# Altium PCB EPM240_Board.PcbDoc
Units mm, origin at the board's own origin, x right, y up, seen from the top; angles counter-clockwise.
Board outline 53.8 x 69.2 mm, 2 copper layers (Top Layer, Bottom Layer), stack 1.571 mm thick; 69 components, 96 nets, 360 pads, 116 vias.
Unrouted connection lines stored in the file: 13.
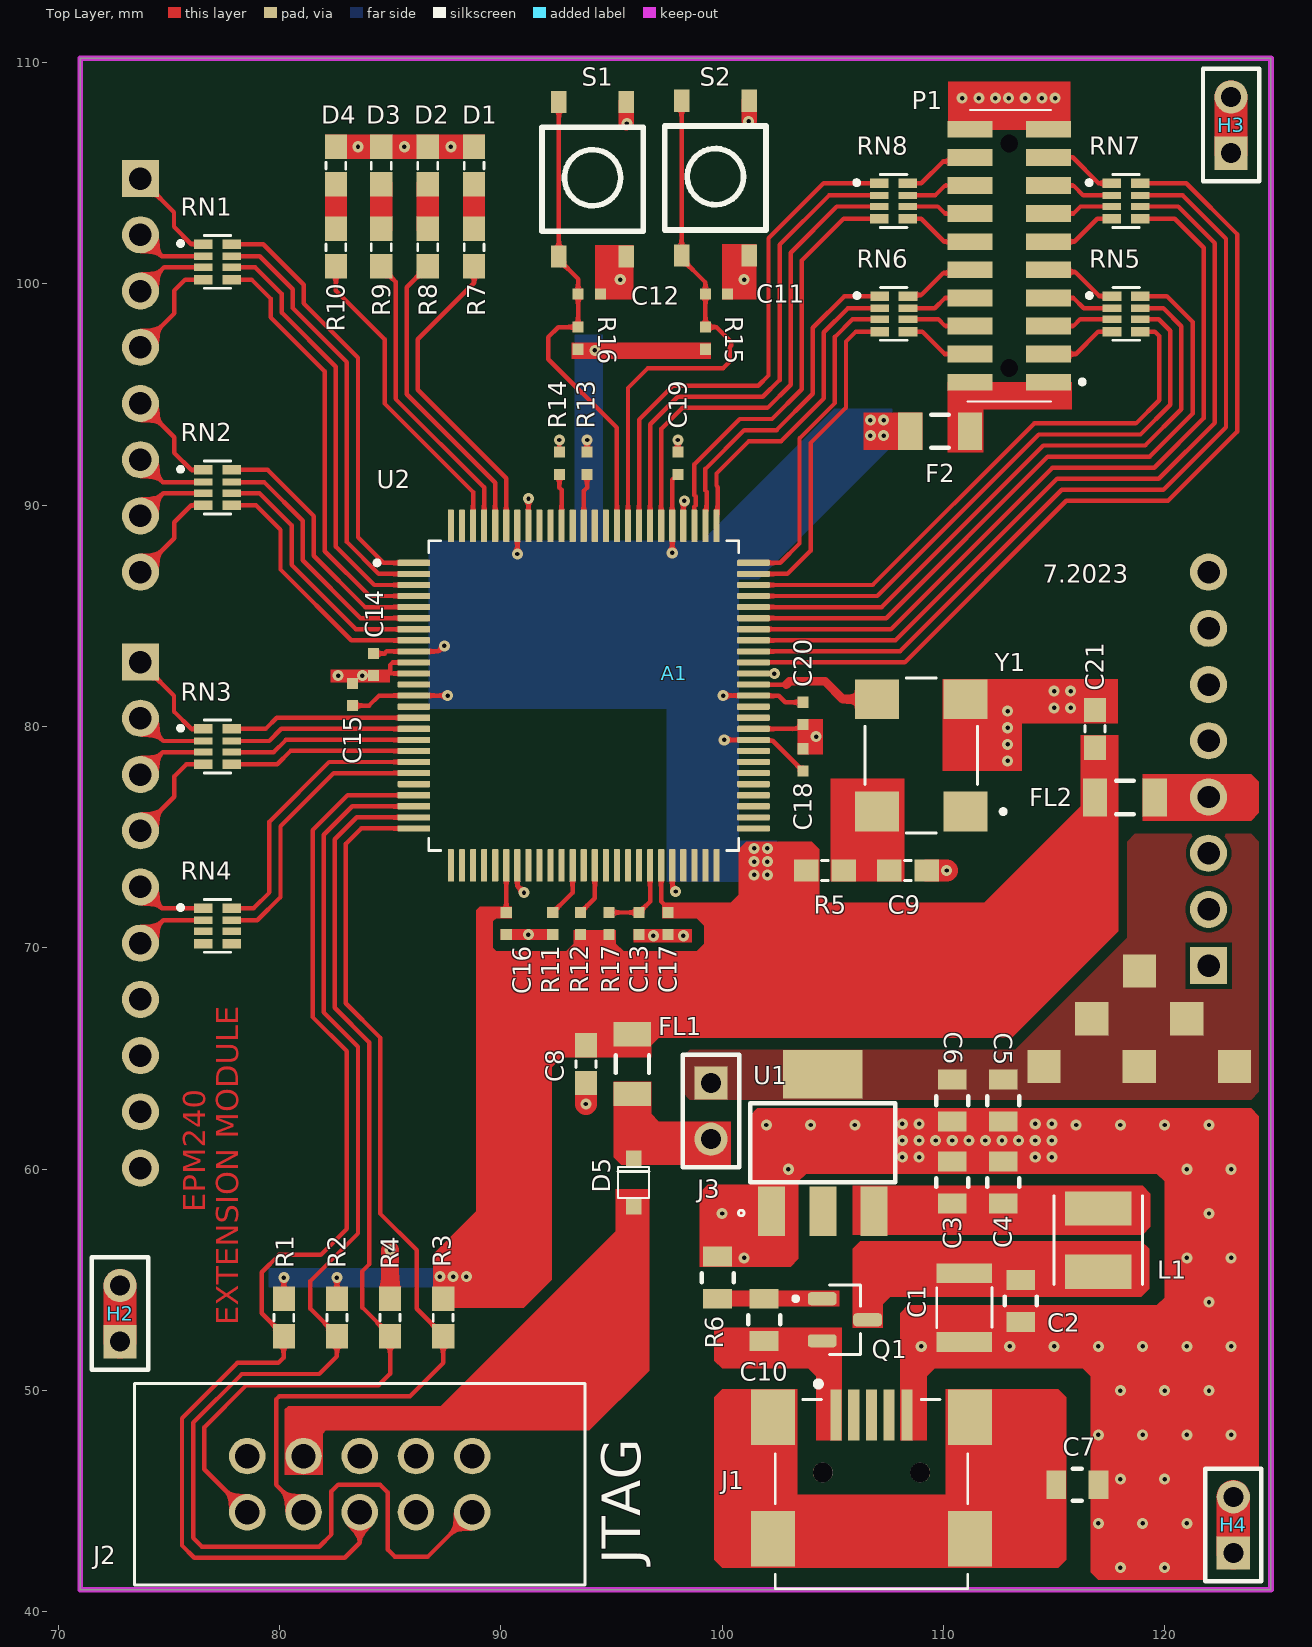
[diagram p0: Top Layer view]
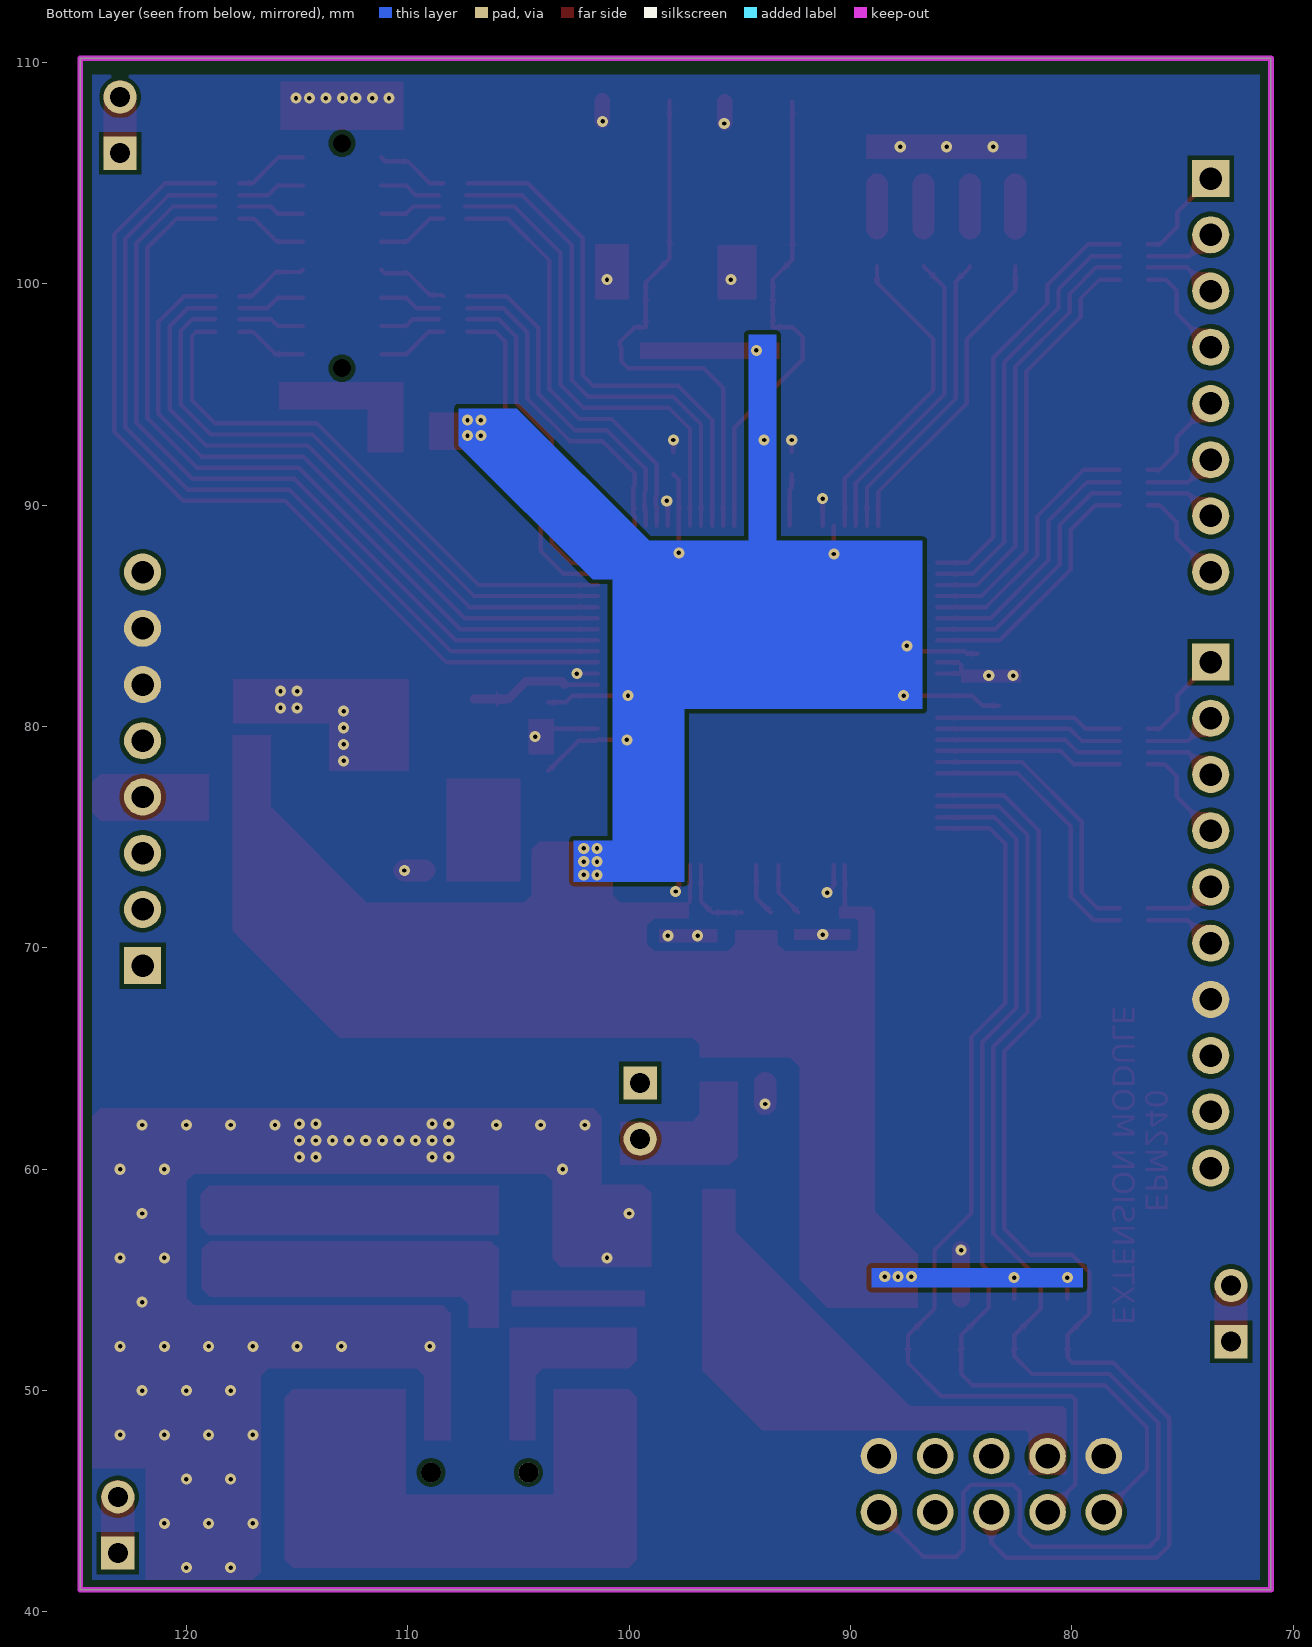
[diagram p1: Bottom Layer view, seen from below]

## Layer stack, top to bottom
Top Solder: solder mask 0.0102, Solder Resist, Dk 3.5
Top Layer: signal copper 0.0356
Dielectric 1: dielectric 1.5, FR-4, Dk 4.8
Bottom Layer: signal copper 0.0356
Bottom Solder: solder mask 0.0102, Solder Resist, Dk 3.5

## Board outline
71,41 71,110.2 124.8,110.2 124.8,41

## Design rules (kind name [scope] priority, off if disabled: settings)
Clearance [All] p1: gap=0.154 ignorepadtopadclearanceinfootprint=TRUE except(0.2: Arc-Poly Arc-Region Track-Poly Track-Region SMDPad-Poly SMDPad-Region THPad-Poly THPad-Region Via-Poly Via-Region Fill-Poly Fill-Region Poly-Poly Poly-Region Region-Region; 0.3: Arc-Track Track-Track)
ComponentClearance [All] p1: gap=0 collisioncheckmode=3 verticalgap=2540 showdistances=FALSE
DiffPairsRouting [All] p1: maxlimit=0.6 minlimit=0.4 mostfreqgap=0.6 toplayer_minwidth=0.2 toplayer_maxwidth=0.2 toplayer_prefwidth=0.2 bottomlayer_minwidth=0.2 bottomlayer_maxwidth=0.2 bottomlayer_prefwidth=0.2 maxuncoupledlength=12.7
MinimumSolderMaskSliver [All] p1: minsoldermaskwidth=0
ParallelSegment [All] p1: limit=254 gap=0.6
PlaneConnect [All] p1: planeconnectstyle=Direct reliefexpansion=0.508 reliefentries=4 reliefconductorwidth=0.254 reliefairgap=0.254
PolygonConnect [All] p1: connectstyle=Direct reliefconductorwidth=0.254 reliefentries=4 polygonreliefangle="90 Angle" airgapwidth=0.254
RoutingVias [All] p1: holewidth=0.2 width=0.5 viastyle="Through Hole" minholewidth=0.2 minwidth=0.5 maxholewidth=0.2 maxwidth=0.5
SilkToSilkClearance [All] p1: silktosilkclearance=0.154
SilkToSolderMaskClearance [IsPad] p1: minsilkscreentomaskgap=0 clearancetoexposedcopper=TRUE
SolderMaskExpansion [All] p1: expansion=0.102 istentingtop=FALSE
Width [All] p1: maxlimit=5 minlimit=0.2 preferedwidth=0.2
24 further rules are at their usual default settings.

## Classes and differential pairs
net class D[29..0]: D0 D1 D2 D3 D4 D5 D6 D7 D8 D9 D10 D11 D12 D13 D14 D15 D16 D17 D18 D19 D20 D21 D22 D23 D24 D25 D26 D27 D28 D29
component class U_PLD: A1 C8 C9 C11 C12 C13 C14 C15 C16 C17 C18 C19 C20 C21 D1 D2 D3 D4 D5 F2 FL1 FL2 H2 H3 H4 J2 P1 R1 R2 R3 R4 R5 R7 R8 R9 R10 R11 R12 R13 R14 R15 R16 R17 RN1 RN2 RN3 RN4 RN5 RN6 RN7 RN8 S1 S2 U2 Y1
component class PWR: C1 C2 C3 C4 C5 C6 C7 C10 J1 J3 L1 Q1 R6 U1

## Components (designator, comment, footprint, x,y, rotation, side; value= is the part's Value field where it differs from the comment)
A1 "A000066" ARDUINO_A000066 124.52,41.26 r90 top locked
C1 "Cap" WCAP-CSGP_885012209019 110.95,53.75 r90 top value=47uF
C2 "Cap" WCAP-CSST_885382207009 113.5,54.05 r90 top value=100nF
C3 "Cap" WCAP-CSST_885382207009 110.4,59.4 r270 top value=100nF
C4 "Cap" WCAP-CSST_885382207009 112.7,59.4 r270 top value=10uF
C5 "Cap" WCAP-CSST_885382207009 112.7,63.1 r90 top value=10uF
C6 "Cap" WCAP-CSST_885382207009 110.4,63.1 r90 top value=100nF
C7 "Cap" WCAP-CSST_885382207009 116.05,45.75 r0 top value=1nF
C8 "Cap" CAPC1608X90 93.85,64.75 r90 top value=100nF
C9 "Cap" CAPC1608X90 108.4,73.5 r180 top value=100nF
C10 "Cap" WCAP-CSST_885382207009 101.9,53.2 r270 top value=10nF
C11 "Cap" WCAP-CSGP_885012105016 99.75,99.55 r180 top value=100nF
C12 "Cap" WCAP-CSGP_885012105016 94,99.55 r180 top value=100nF
C13 "Cap" WCAP-CSGP_885012105016 96.25,71.1 r90 top value=100nF
C14 "Cap" WCAP-CSGP_885012105016 84.25,82.8 r90 top value=100nF
C15 "Cap" WCAP-CSGP_885012105016 83.3,81.45 r270 top value=100nF
C16 "Cap" WCAP-CSGP_885012105016 90.25,71.1 r90 top value=100nF
C17 "Cap" WCAP-CSGP_885012105016 97.55,71.1 r90 top value=100nF
C18 "Cap" WCAP-CSGP_885012105016 103.65,78.5 r270 top value=100nF
C19 "Cap" WCAP-CSGP_885012105016 98,91.9 r270 top value=100nF
C20 "Cap" WCAP-CSGP_885012105016 103.65,80.6 r90 top value=100nF
C21 "Cap" CAPC1608X90 116.85,79.9 r270 top value=100nF
D1 "LED0" CAPC1608X90 88.8,105.35 r90 top
D2 "LED0" CAPC1608X90 86.7,105.35 r90 top
D3 "LED0" CAPC1608X90 84.6,105.35 r90 top
D4 "LED0" CAPC1608X90 82.55,105.35 r90 top
D5 "BAS16J" SOD323F 96,59.4 r270 top
F2 "Fuse Thermal" C1206 109.85,93.35 r180 top
FL1 "BLM21BD152SZ1D" C1206 95.95,64.75 r90 top
FL2 "BLM21BD152SZ1D" C1206 118.2,76.8 r0 top
H2 "Header 2" HDR1X2 72.8,52.21 r90 top
H3 "Header 2" HDR1X2 123,105.91 r90 top
H4 "Header 2" HDR1X2 123.1,42.66 r90 top
J1 "3-1734035-2" TE_3-1734035-2 106.75,46.3 r0 top
J2 "JTAG" 61201021621 83.63,45.77 r0 top
J3 "USB POWER" HDR1X2 99.5,63.9 r270 top
L1 "LQH44NN4R7M03L" IND_LQH44NN4R7M03L 117,56.8 r90 top
P1 "Header 10X2" 2002132110020C4LF 112.975,101.275 r270 top
Q1 "IRLML6402TRPBF" SOT95P237X112-3N 105.55,53.2 r0 top
R1 "Res1" CAPC1608X90 80.2,53.3 r270 top value=10K
R2 "Res1" CAPC1608X90 82.6,53.3 r270 top value=10K
R3 "Res1" CAPC1608X90 87.4,53.3 r270 top value=10K
R4 "Res1" CAPC1608X90 85,53.3 r270 top value=10K
R5 "Res1" CAPC1608X90 104.65,73.5 r180 top value=10
R6 "Res1" WCAP-CSST_885382207009 99.8,55.1 r270 top value=100
R7 "Res1" CAPC1608X90 88.8,101.65 r270 top value=1K
R8 "Res1" CAPC1608X90 86.7,101.65 r270 top value=1K
R9 "Res1" CAPC1608X90 84.6,101.65 r270 top value=1K
R10 "Res1" CAPC1608X90 82.55,101.65 r270 top value=1K
R11 "Res1" WCAP-CSGP_885012105016 92.35,71.1 r270 top value=0
R12 "Res1" WCAP-CSGP_885012105016 93.6,71.1 r270 top value=0
R13 "Res1" WCAP-CSGP_885012105016 93.9,91.9 r270 top value=0
R14 "Res1" WCAP-CSGP_885012105016 92.65,91.9 r270 top value=0
R15 "Res1" WCAP-CSGP_885012105016 99.25,97.55 r270 top value=10K
R16 "Res1" WCAP-CSGP_885012105016 93.5,97.55 r270 top value=10K
R17 "Res1" WCAP-CSGP_885012105016 94.9,71.1 r270 top value=10K
RN1 "741X083681JP" RESCAXS50P200X100X45_8N 77.2,101 r0 top
RN2 "741X083681JP" RESCAXS50P200X100X45_8N 77.2,90.8 r0 top
RN3 "741X083681JP" RESCAXS50P200X100X45_8N 77.2,79.1 r0 top
RN4 "741X083681JP" RESCAXS50P200X100X45_8N 77.2,71 r0 top
RN5 "741X083681JP" RESCAXS50P200X100X45_8N 118.26,98.65 r0 top
RN6 "741X083681JP" RESCAXS50P200X100X45_8N 107.76,98.65 r0 top
RN7 "741X083681JP" RESCAXS50P200X100X45_8N 118.25,103.75 r0 top
RN8 "741X083681JP" RESCAXS50P200X100X45_8N 107.75,103.75 r0 top
S1 "SW-PB" SW_4.5X4.5 94.15,104.8 r90 top
S2 "SW-PB" SW_4.5X4.5 99.7,104.85 r90 top
U1 "LD1117S33CTR" SOT223 104.55,61.2 r90 top
U2 "EPM240T100C5N" QFP50P1600X1600X120-100N 93.75,81.4 r0 top
Y1 "ASV-50.000MHZ-EJ-T" XTAL_ASV-50.000MHZ-EJ-T 109,78.7 r180 top

## Footprints (in the part's own frame and the unit in brackets; to place one, negate y for a bottom-side part, rotate by r counter-clockwise, add the part's x,y. Pads: shape width x height; smd on the part's side, far side on the other; paste and mask are expansions set on the pad)
61201021621 [mm]
  round 1.65 hole 1.1: 1(-5.08,-1.27) 2(-5.08,1.27) 3(-2.54,-1.27) 4(-2.54,1.27) 5(0,-1.27) 6(0,1.27) 7(2.54,-1.27) 8(2.54,1.27) 9(5.08,-1.27) 10(5.08,1.27)
  silkscreen extent -10.18,-4.55 10.18,4.55
2002132110020C4LF [mm]
  rect 0.76x2.05 smd: 1(5.715,1.775) 2(5.715,-1.775) 3(4.445,1.775) 4(4.445,-1.775) 5(3.175,1.775) 6(3.175,-1.775) 7(1.905,1.775) 8(1.905,-1.775) 9(0.635,1.775) 10(0.635,-1.775) 11(-0.635,1.775) 12(-0.635,-1.775) 13(-1.905,1.775) 14(-1.905,-1.775) 15(-3.175,1.775) 16(-3.175,-1.775) 17(-4.445,1.775) 18(-4.445,-1.775) 19(-5.715,1.775) 20(-5.715,-1.775)
  round 0.405 hole 0.81 unplated: 21(-5.08,0) 22(5.08,0)
  silkscreen extent -6.58,-1.88 6.58,3.4
ARDUINO_A000066 [mil]
  round 66 hole 40: 3V3(1400,100) 5V(1500,100) A4(SDA)(840,2000) A5(SCL)(740,2000) AREF(940,2000) D1(2400,2000) D2(2300,2000) D3(2200,2000) D4(2100,2000) D5(2000,2000) D6(1900,2000) D7(1800,2000) D9(1540,2000) D10(1440,2000) D11(1340,2000) D12(1240,2000) D13(1140,2000) GND_1(1700,100) GND_2(1600,100) GND_3(1040,2000) IOREF(1200,100) RST(1300,100) VIN(1800,100)
  rect 66x66 / inner round 66 / far side rect 66x66 hole 40: D0(2500,2000) D8(1640,2000) P1(1100,100)
C1206 [mm] "Chip Capacitor, Body 3.2x1.6mm, IPC High Density"
  rect 1.1x1.7 smd: 1(-1.35,0) 2(1.35,0)
  silkscreen extent -0.4,-0.75 0.4,0.75, body extent -1.7,-0.9 1.7,0.9, height 1.3
CAPC1608X90 [mm]
  rect 1.1x1 smd: 1(-0.85,0) 2(0.85,0)
  silkscreen extent -0.15,-0.45 0.15,0.45
HDR1X2 [mm] "Connector; Header; 2 Position"
  rect 1.5x1.5 hole 0.9: 1(0,0)
  round 1.5 hole 0.9: 2(2.54,0)
  silkscreen extent -1.27,-1.27 3.81,1.27
IND_LQH44NN4R7M03L [mm]
  rect 1.55x3 smd: 1(-1.425,0) 2(1.425,0)
  silkscreen extent -2,-2 2,2
QFP50P1600X1600X120-100N [mm]
  rrect25% 1.47x0.28 smd: 1(-7.67,6) 2(-7.67,5.5) 3(-7.67,5) 4(-7.67,4.5) 5(-7.67,4) 6(-7.67,3.5) 7(-7.67,3) 8(-7.67,2.5) 9(-7.67,2) 10(-7.67,1.5) 11(-7.67,1) 12(-7.67,0.5) 13(-7.67,0) 14(-7.67,-0.5) 15(-7.67,-1) 16(-7.67,-1.5) 17(-7.67,-2) 18(-7.67,-2.5) 19(-7.67,-3) 20(-7.67,-3.5) 21(-7.67,-4) 22(-7.67,-4.5) 23(-7.67,-5) 24(-7.67,-5.5) 25(-7.67,-6) 51(7.67,-6) 52(7.67,-5.5) 53(7.67,-5) 54(7.67,-4.5) 55(7.67,-4) 56(7.67,-3.5) 57(7.67,-3) 58(7.67,-2.5) 59(7.67,-2) 60(7.67,-1.5) 61(7.67,-1) 62(7.67,-0.5) 63(7.67,0) 64(7.67,0.5) 65(7.67,1) 66(7.67,1.5) 67(7.67,2) 68(7.67,2.5) 69(7.67,3) 70(7.67,3.5) 71(7.67,4) 72(7.67,4.5) 73(7.67,5) 74(7.67,5.5) 75(7.67,6)
  rrect25% 0.28x1.47 smd: 26(-6,-7.67) 27(-5.5,-7.67) 28(-5,-7.67) 29(-4.5,-7.67) 30(-4,-7.67) 31(-3.5,-7.67) 32(-3,-7.67) 33(-2.5,-7.67) 34(-2,-7.67) 35(-1.5,-7.67) 36(-1,-7.67) 37(-0.5,-7.67) 38(0,-7.67) 39(0.5,-7.67) 40(1,-7.67) 41(1.5,-7.67) 42(2,-7.67) 43(2.5,-7.67) 44(3,-7.67) 45(3.5,-7.67) 46(4,-7.67) 47(4.5,-7.67) 48(5,-7.67) 49(5.5,-7.67) 50(6,-7.67) 76(6,7.67) 77(5.5,7.67) 78(5,7.67) 79(4.5,7.67) 80(4,7.67) 81(3.5,7.67) 82(3,7.67) 83(2.5,7.67) 84(2,7.67) 85(1.5,7.67) 86(1,7.67) 87(0.5,7.67) 88(0,7.67) 89(-0.5,7.67) 90(-1,7.67) 91(-1.5,7.67) 92(-2,7.67) 93(-2.5,7.67) 94(-3,7.67) 95(-3.5,7.67) 96(-4,7.67) 97(-4.5,7.67) 98(-5,7.67) 99(-5.5,7.67) 100(-6,7.67)
  silkscreen extent -9.44,-7 7,7
RESCAXS50P200X100X45_8N [mm]
  rect 0.84x0.43 smd: 1(-0.64,0.8) 4(-0.64,-0.8) 5(0.64,-0.8) 8(0.64,0.8)
  rect 0.84x0.33 smd: 2(-0.64,0.25) 3(-0.64,-0.25) 6(0.64,-0.25) 7(0.64,0.25)
  silkscreen extent -1.76,-1.19 0.6,1.19
SOD323F [mm]
  rect 0.7x0.7 smd: 1(-1.1,0) 2(1.1,0)
  silkscreen extent -0.7,-0.7 0.7,0.7
SOT95P237X112-3N [mm]
  rrect50% 1.3x0.59 smd: 1(-1.025,0.95) 2(-1.025,-0.95) 3(1.025,0)
  silkscreen extent -2.32,-1.57 0.7,1.57
SOT223 [mil]
  rect 88x48 smd: 1(-122,91) 2(-122,0) 3(-122,-91)
  rect 86.61x141.73 smd: 4(122.01,0)
  silkscreen extent -130,-129 70,150, body extent -128,-138 128,138, height 71
SW_4.5X4.5 [mm]
  rect 1x0.7 smd: 1(-3.556,1.524) 1(3.429,1.524) 2(-3.556,-1.524) 2(3.429,-1.524)
  silkscreen extent -2.41,-2.29 2.29,2.29
TE_3-1734035-2 [mm]
  rect 0.5x2.3 smd: 1(-1.6,2.6) 2(-0.8,2.6) 3(0,2.6) 4(0.8,2.6) 5(1.6,2.6)
  rect 2x2.5 smd: SH1(-4.45,2.5) SH2(4.45,2.5) SH3(-4.45,-3) SH4(4.45,-3)
  round 0.9 hole 0.9 unplated: ""(-2.2,0) ""(2.2,0)
  silkscreen extent -4.35,-5.25 4.35,4.1
WCAP-CSGP_885012105016 [mm]
  rect 0.5x0.5 smd: 1(-0.5,0) 2(0.5,0)
WCAP-CSGP_885012209019 [mm]
  rect 0.9x2.5 smd: 1(-1.55,0) 2(1.55,0)
  silkscreen extent -0.9,-1.25 0.91,1.25
WCAP-CSST_885382207009 [mm]
  rect 0.9x1.3 smd: 1(-0.95,0) 2(0.95,0)
  silkscreen extent -0.2,-0.72 0.2,0.72
XTAL_ASV-50.000MHZ-EJ-T [mm]
  rect 2x1.8 smd: 1(-2,2.54) 2(-2,-2.54) 3(2,-2.54) 4(2,2.54)
  silkscreen extent -3.8,-3.5 2.54,3.5

## Part data
A1: "Microcontroller board based on the ATmega328P", Package=None, Availability="Not in stock", Check_prices=https://www.snapeda.com/parts/ARDUINO%20UNO%20REV3%20DEVELOPMENT%20BOARD/Arduino/view-part/?ref=eda, MF=Arduino, MP="ARDUINO UNO REV3 DEVELOPMENT BOARD", Price=None, SnapEDA_Link=https://www.snapeda.com/parts/ARDUINO%20UNO%20REV3%20DEVELOPMENT%20BOARD/Arduino/view-part/?ref=snap
C1 C2 C3 C4 C5 C6 C7 C8 C9 C10 C11 C12 C13 C14 C15 C16 C17 C18 C19 C20 C21: "Capacitor", LatestRevisionDate=17-Jul-2002, LatestRevisionNote="Re-released for DXP Platform.", PackageDescription="Radial Cap, Thru-Hole; 2 Leads; 0.3 in Pin Spacing", PackageReference=RAD-0.3, Published=8-Jun-2000, Publisher="Altium Limited"
D1 D2 D3 D4: "Typical INFRARED GaAs LED", LatestRevisionDate=08-Jul-2005, LatestRevisionNote="Mech Layer 1 removed.", PackageDescription="LED; 2 Leads", PackageReference=LED-0, Published=8-Jun-2000, Publisher="Altium Limited"
D5: "Diode Standard 100V 250mA _DC_ Surface Mount SOD-323F", Package="SOD-323 Nexperia USA", Availability=Unavailable, MF="Nexperia USA", MP=BAS16J, Price=None, SnapEDA_Link=https://www.snapeda.com/parts/BAS16J/Nexperia%20USA%20Inc./view-part/216819/?ref=snap
F2: "Thermal Fuse", LatestRevisionDate=17-Jul-2002, LatestRevisionNote="Re-released for DXP Platform.", PackageDescription="Thru-Hole; 2 Leads", PackageReference=PIN-W2/E2.8, Published=24-Mar-1999, Publisher="Altium Limited"
FL1 FL2: "1 Ferrite Bead 0805 (2012 Metric) 250mA 450mOhm", Package="2012 Murata", Availability=Warning, Check_prices=https://www.snapeda.com/parts/BLM21BD152SZ1D/Murata/view-part/2726779/?ref=eda, MF=Murata, Mouser-Purchase-URL=https://snapeda.com/shop?store=Mouser&id=2726779, MP=BLM21BD152SZ1D, Price=None, SnapEDA_Link=https://www.snapeda.com/parts/BLM21BD152SZ1D/Murata/view-part/2726779/?ref=snap
H2 H3 H4: "Header, 2-Pin", LatestRevisionDate=17-Jul-2002, LatestRevisionNote="Re-released for DXP Platform.", Publisher="Altium Limited"
J1: "USB Connectors MINI USB, R/A, SMT, MATTE TIN, W/O MYLAR", Package=None, Availability="In Stock", Check_prices=https://www.snapeda.com/parts/3-1734035-2/TE+Connectivity+AMP+Connectors/view-part/?ref=eda, MF="TE Connectivity", MP=3-1734035-2, Price=None, Purchase-URL=https://pricing.snapeda.com/search/part/3-1734035-2/?ref=eda, SnapEDA_Link=https://www.snapeda.com/parts/3-1734035-2/TE+Connectivity+AMP+Connectors/view-part/?ref=snap
J2: library part 61201021621, "Connector Header Through Hole 10 position 0.100 _2.54mm_", Package=None, Availability=Unavailable, MF="Wurth Electronics", MP=61201021621, Price=None, SnapEDA_Link=https://www.snapeda.com/parts/61201021621/Wurth%20Electronics%20Inc./view-part/1156232/?ref=snap
J3: library part "Header 2", "Header, 2-Pin", LatestRevisionDate=17-Jul-2002, LatestRevisionNote="Re-released for DXP Platform.", Publisher="Altium Limited"
L1: "FIXED IND 22UH 950MA 170 MOHM", Package=None, Availability=Unavailable, MP=LQH44NN4R7M03L, Price=None
P1: "Header, 10-Pin, Dual row", LatestRevisionDate=17-Jul-2002, LatestRevisionNote="Re-released for DXP Platform.", Publisher="Altium Limited"
Q1: "RoHS Compliant", Package="SOT-23 Infineon", Availability=Unavailable, MF=Infineon, MP=IRLML6402TRPBF, Price=None, SnapEDA_Link=https://www.snapeda.com/parts/IRLML6402TRPBF/Infineon%20Technologies/view-part/523558/?ref=snap
R1 R2 R3 R4 R5 R6 R7 R8 R9 R10 R11 R12 R13 R14 R15 R16 R17: "Resistor", LatestRevisionDate=17-Jul-2002, LatestRevisionNote="Re-released for DXP Platform.", PackageDescription="Axial Device, Thru-Hole; 2 Leads; 0.3 in Pin Spacing", PackageReference=AXIAL-0.3, Published=8-Jun-2000, Publisher="Altium Limited"
RN1 RN2 RN3 RN4 RN5 RN6 RN7 RN8: "Resistor Networks & Arrays 680ohms 5% Isolated", Package="0402 CTS Components", Availability="In Stock", Check_prices=https://www.snapeda.com/parts/741X083681JP/CTS%20Components/view-part/1384528/?ref=eda, MF="CTS Components", MP=741X083681JP, Price=None, SnapEDA_Link=https://www.snapeda.com/parts/741X083681JP/CTS%20Components/view-part/1384528/?ref=snap
S1 S2: "Switch", LatestRevisionDate=17-Jul-2002, LatestRevisionNote="Re-released for DXP Platform.", PackageDescription="Switch; 2 Leads", PackageReference=SPST-2, Published=24-Mar-1999, Publisher="Altium Limited"
U1: "Linear Voltage Regulator IC Positive Fixed 1 Output 800mA SOT-223", Package="SOT-223 STMicroelectronics", Availability="In Stock", Check_prices=https://www.snapeda.com/parts/LD1117S33CTR/STMicroelectronics/view-part/?ref=eda, MF=STMicroelectronics, MP=LD1117S33CTR, Price=None, Purchase-URL=https://pricing.snapeda.com/search/part/LD1117S33CTR/?ref=eda, SnapEDA_Link=https://www.snapeda.com/parts/LD1117S33CTR/STMicroelectronics/view-part/?ref=snap
U2: "IC CPLD 192MC 4.7NS 100TQFP", Package="TQFP-100 Altera", Availability=Unavailable, MF=Intel, MP=EPM240T100C5N, Price=None, SnapEDA_Link=https://www.snapeda.com/parts/EPM240T100C5N/Intel/view-part/38204/?ref=snap
Y1: Package=None, Availability=Unavailable, MP=ASV-50.000MHZ-EJ-T, Price=None

## Free pads (board coordinates)
  rect 1.5x1.5 smd: ""(114.55,64.65) ""(116.7,66.8) ""(118.85,64.65) ""(118.86,68.963) ""(121,66.8) ""(123.15,64.65)

## Via types
v1: diameter 0.5, hole 0.2, Top Layer to Bottom Layer, tented both sides, 112 vias
v2: diameter 0.5, hole 0.2, Top Layer to Bottom Layer, 4 vias

## Nets (pads, with @x,y where several pads share a name; then routed paths per layer and width w, separated by ;. In a path a pad name is that pad's centre, name@x,y a point inside that pad or via, vN(x,y) a via of type N, cw(c..) or ccw(c..) an arc to the next point about the centre after c; other vN are vias at no path point)
3.3V: D5.1 FL1.1 J3.2
5V: C10.2 J1.1 Q1.2
CLK: U2.64 Y1.3 | length 6
  Top Layer w0.2: U2.64 102.047,81.9 102.055,81.892 102.892,81.892 102.9,81.9
  Top Layer w0.4: 102.9,81.9 103.05,82.05 104.65,82.05 105.46,81.24 Y1.3
D0: RN1.8 U2.1 | length 19.5
  Top Layer w0.2: RN1.8 79.264,101.8 81.1,99.964 81.1,99.121 83.55,96.671 83.55,88.55 84.7,87.4 U2.1
D1: RN1.7 U2.2 | length 19.4
  Top Layer w0.2: RN1.7 79.107,101.25 80.6,99.757 80.6,98.914 83.05,96.464 83.05,88.343 84.493,86.9 U2.2
D2: RN1.6 U2.3 | length 19.4
  Top Layer w0.2: RN1.6 78.9,100.75 80.1,99.55 80.1,98.707 82.55,96.257 82.55,88.136 84.286,86.4 U2.3
D3: RN1.5 U2.4 | length 19.4
  Top Layer w0.2: RN1.5 78.743,100.2 79.6,99.343 79.6,98.5 82.05,96.05 82.05,87.929 84.079,85.9 U2.4
D4: RN2.8 U2.5 | length 11.9
  Top Layer w0.2: RN2.8 79.464,91.6 81.55,89.514 81.55,87.722 83.872,85.4 U2.5
D5: RN2.7 U2.6 | length 11.8
  Top Layer w0.2: RN2.7 79.307,91.05 81.05,89.307 81.05,87.514 83.664,84.9 U2.6
D6: RN2.6 U2.7 | length 11.8
  Top Layer w0.2: RN2.6 79.1,90.55 80.55,89.1 80.55,87.307 83.457,84.4 U2.7
D7: RN2.5 U2.8 | length 11.8
  Top Layer w0.2: RN2.5 78.943,90 80.05,88.893 80.05,87.1 83.25,83.9 U2.8
D8: RN3.8 U2.15 | length 8.4
  Top Layer w0.2: RN3.8 77.851,79.911 79.389,79.911 79.879,80.4 U2.15
D9: RN3.7 U2.16 | length 8.5
  Top Layer w0.2: RN3.7 79.536,79.35 80.086,79.9 U2.16
D10: RN3.6 U2.17 | length 8.5
  Top Layer w0.2: RN3.6 79.743,78.85 80.293,79.4 U2.17
D11: RN3.5 U2.18 | length 8.5
  Top Layer w0.2: RN3.5 79.9,78.3 80.5,78.9 U2.18
D12: RN4.8 U2.19 | length 12.8
  Top Layer w0.2: RN4.8 78.843,71.8 79.55,72.507 79.55,75.707 82.243,78.4 U2.19
D13: RN4.7 U2.20 | length 12.9
  Top Layer w0.2: RN4.7 79,71.25 80.05,72.3 80.05,75.5 82.45,77.9 U2.20
D14: RN7.8 U2.66 | length 40.6
  Top Layer w0.2: U2.66 108.25,82.9 115.55,90.2 120.15,90.2 123.268,93.318 123.268,102.253 120.971,104.55 RN7.8@118.69,104.55
D15: RN7.7 U2.67 | length 39
  Top Layer w0.2: U2.67 108.043,83.4 115.343,90.7 119.943,90.7 122.768,93.526 122.768,102.046 120.814,104 RN7.7@118.69,104
D16: RN7.6 U2.68 | length 37.3
  Top Layer w0.2: U2.68 107.836,83.9 115.136,91.2 119.736,91.2 122.268,93.733 122.268,101.839 120.607,103.5 RN7.6@118.69,103.5
D17: RN7.5 U2.69 | length 35.6
  Top Layer w0.2: U2.69 107.628,84.4 114.928,91.7 119.528,91.7 121.768,93.94 121.768,101.632 120.45,102.95 RN7.5@118.69,102.95
D18: RN5.8 U2.70 | length 30.9
  Top Layer w0.2: U2.70 107.421,84.9 114.721,92.2 119.321,92.2 121.268,94.147 121.268,98.282 120.1,99.45 RN5.8@118.7,99.45
D19: RN5.7 U2.71 | length 29.2
  Top Layer w0.2: U2.71 107.214,85.4 114.514,92.7 119.114,92.7 120.75,94.336 120.75,98.093 119.943,98.9 RN5.7@118.7,98.9
D20: RN5.6 U2.72 | length 27.5
  Top Layer w0.2: U2.72 107.007,85.9 114.307,93.2 118.907,93.2 120.25,94.543 120.25,97.886 119.736,98.4 RN5.6@118.7,98.4
D21: RN5.5 U2.73 | length 25.8
  Top Layer w0.2: U2.73 106.8,86.4 114.1,93.7 118.7,93.7 119.75,94.75 119.75,97.65 119.55,97.85 RN5.5@118.7,97.85
D22: RN6.4 U2.74 | length 15
  Top Layer w0.2: U2.74 102.95,86.9 104,87.95 104,92.814 105.6,94.414 105.6,97.4 106.05,97.85 RN6.4@107.32,97.85
D23: RN6.3 U2.75 | length 15
  Top Layer w0.2: U2.75 102.626,87.4 103.5,88.274 103.5,93.022 105.1,94.622 105.1,97.607 105.893,98.4 RN6.3@107.32,98.4
D24: RN6.2 U2.76 | length 14.8
  Top Layer w0.2: U2.76 99.75,89.523 99.804,89.577 99.804,90.823 99.75,90.877 99.75,91.436 101.214,92.9 102.671,92.9 104.6,94.829 104.6,97.814 105.686,98.9 RN6.2@107.32,98.9
D25: RN6.1 U2.77 | length 15.7
  Top Layer w0.2: U2.77 99.25,89.73 99.304,89.784 99.304,90.616 99.25,90.67 99.25,91.643 101.007,93.4 102.464,93.4 104.1,95.036 104.1,98.021 105.529,99.45 RN6.1@107.32,99.45
D26: RN8.4 U2.78 | length 19.4
  Top Layer w0.2: U2.78 98.75,89.937 98.804,89.991 98.804,90.409 98.75,90.463 98.75,91.85 100.8,93.9 102.257,93.9 103.6,95.243 103.6,101.061 105.489,102.95 RN8.4@107.35,102.95
D27: RN8.3 U2.81 | length 22.2
  Top Layer w0.2: U2.81 97.25,93.45 98.2,94.4 102.05,94.4 103.1,95.45 103.1,101.415 105.185,103.5 RN8.3@107.397,103.5
D28: RN8.2 U2.82 | length 23.1
  Top Layer w0.2: U2.82 96.75,93.657 97.993,94.9 101.843,94.9 102.6,95.657 102.6,101.768 104.832,104 107.31,104 RN8.2@107.35,104
D29: RN8.1 U2.83 | length 23.9
  Top Layer w0.2: U2.83 96.25,93.864 97.786,95.4 101.636,95.4 102.1,95.864 102.1,102.065 104.585,104.55 RN8.1@107.3,104.55
GND: A1.GND_1 A1.GND_2 A1.GND_3 C1.1 C2.1 C3.1 C4.1 C5.1 C6.1 C7.2 C8.1 C9.1 C11.1 C12.1 C13.1 C14.1 C15.1 C16.1 C17.1 C18.1 C19.1 C20.1 C21.1 D1.2 D2.2 D3.2 D4.2 J1.5 J2.2 J2.10 P1.19 P1.20 R4.1 R6.1 R11.2 R14.1 S1.2 S2.2 U1.1 U2.10 U2.11 U2.32 U2.46 U2.60 U2.65 U2.79 U2.93 Y1.2 | length 17.9
  Top Layer w0.2: C14.1 C14.1@84.267,82.317 ; U2.11 85,82.4 85,82.783 85.117,82.9 U2.10 ; U2.32 90.75,72.8 v1(91.05,72.5) ; U2.93 91.252,89.072 91.252,90.298 v1(91.254,90.3) ; R14.1 v1(92.65,92.95) ; U2.46 97.75,72.7 v1(97.9,72.55) ; C19.1 v1(98,92.95) ; U2.79 98.25,90.15 v1(98.3,90.2) ; U2.60 103.45,79.9 C20.1 ; U2.65 102.36,82.4 v1(102.364,82.396)
  Top Layer w0.7: v1@95.674,107.276 S1.2@95.674,108.229 ; v1@101.224,107.374 S2.2@101.224,108.279
  Top Layer w0.8: R4.1 v1(85,56.35)
  Top Layer w1: v1(93.85,62.95) C8.1 ; C9.1 v1(110.15,73.5) ; Y1.2 Y1.2@111.04,81.2
  other v1: 118,42 120,42 117,44 119,44 121,44 118,46 120,46 117,48 119,48 121,48 123,48 118,50 120,50 122,50 109,52 113,52 115,52 117,52 119,52 121,52 123,52 122,54 101,56 121,56 123,56 100,58 122,58 103,60 121,60 123,60 108.15,60.55 108.9,60.55 114.15,60.55 114.9,60.55 108.15,61.3 108.9,61.3 109.65,61.3 110.4,61.3 111.15,61.3 111.9,61.3 112.65,61.3 113.4,61.3 114.15,61.3 114.9,61.3 102,62 104,62 106,62 116,62 118,62 120,62 122,62 108.15,62.05 108.9,62.05 114.15,62.05 114.9,62.05 96.9,70.55 98.25,70.55 91.25,70.6 112.9,78.45 112.9,79.2 104.25,79.55 112.9,79.95 112.9,80.7 82.65,82.3 83.75,82.3 95.4,100.2 101,100.2 83.55,106.2 85.65,106.2 87.75,106.2 95.7,107.25 101.2,107.35 110.85,108.4 111.6,108.4 112.35,108.4 112.95,108.4 113.7,108.4 114.45,108.4 115.05,108.4
  other v2: 115,80.85 115.75,80.85 115,81.6 115.75,81.6
IO/DEV_CLRN: C13.2 R17.1 U2.44 | length 3.7
  Top Layer w0.2: R17.1 C13.2 96.75,72.1 U2.44
K1: C12.2 R16.1 S1.1 U2.85 | length 21.9
  Top Layer w0.2: S1.1@92.626,108.229 92.626,101.244 92.626,101.094 93.5,100.22 C12.2 R16.1 92.6,98.05 92.15,97.6 92.15,96.6 95.25,93.5 U2.85
K2: C11.2 R15.1 S2.1 U2.84 | length 24.4
  Top Layer w0.2: U2.84 95.75,95.3 96.65,96.2 100.05,96.2 100.35,96.5 100.35,97.15 100.417,97.217 100.417,97.383 99.75,98.05 R15.1 99.25,100.07 98.176,101.144 98.176,101.294 S2.1@98.176,108.279
LED1: R7.2 U2.95 | length 14.4
  Top Layer w0.2: R7.2 88.8,100.05 86.25,97.5 86.25,95.221 90.25,91.221 U2.95
LED2: R8.2 U2.96 | length 13.8
  Top Layer w0.2: R8.2 85.75,99.85 85.75,95.014 89.75,91.014 U2.96
LED3: R9.2 U2.97 | length 13.7
  Top Layer w0.2: R9.2 84.6,100.75 85.25,100.1 85.25,94.807 89.25,90.807 U2.97
LED4: R10.2 U2.98 | length 14.3
  Top Layer w0.2: R10.2 82.55,99.7 84.75,97.5 84.75,94.6 88.75,90.6 U2.98
NetA1_3V3: A1.3V3 FL2.2
NetA1_D0: A1.D0 RN1.1 | length 4.5
  Top Layer w0.2: A1.D0 75.238,103.242 75.238,102.579 76.017,101.8 RN1.1
NetA1_D1: A1.D1 RN1.2 | length 3.2
  Top Layer w0.2: A1.D1 74.69,101.25 RN1.2
NetA1_D2: A1.D2 RN1.3 | length 3.3
  Top Layer w0.2: A1.D2 74.79,100.75 RN1.3
NetA1_D3: A1.D3 RN1.4 | length 4.7
  Top Layer w0.2: A1.D3 75.25,98.67 75.25,99.7 75.75,100.2 RN1.4
NetA1_D4: A1.D4 RN2.1 | length 4.5
  Top Layer w0.2: A1.D4 75.25,93.07 75.25,92.367 76.017,91.6 RN2.1
NetA1_D5: A1.D5 RN2.2 | length 3.3
  Top Layer w0.2: A1.D5 74.73,91.05 RN2.2
NetA1_D6: A1.D6 RN2.3 | length 3.3
  Top Layer w0.2: A1.D6 74.75,90.55 RN2.3
NetA1_D7: A1.D7 RN2.4 | length 4.5
  Top Layer w0.2: A1.D7 75.25,88.51 75.25,89.233 76.017,90 RN2.4
NetA1_D8: A1.D8 RN3.1 | length 4.5
  Top Layer w0.2: A1.D8 75.238,81.398 75.238,80.679 76.017,79.9 RN3.1
NetA1_D9: A1.D9 RN3.2 | length 3.3
  Top Layer w0.2: A1.D9 74.746,79.35 RN3.2
NetA1_D10: A1.D10 RN3.3 | length 3.3
  Top Layer w0.2: A1.D10 74.734,78.85 RN3.3
NetA1_D11: A1.D11 RN3.4 | length 4.6
  Top Layer w0.2: A1.D11 75.25,76.826 75.25,77.75 75.8,78.3 RN3.4
NetA1_D12: A1.D12 RN4.1 | length 3.2
  Top Layer w0.2: A1.D12 74.676,71.8 RN4.1
NetA1_D13: A1.D13 RN4.2 | length 3.3
  Top Layer w0.2: A1.D13 74.754,71.25 RN4.2
NetC1_2: C1.2 C2.2 L1.1 Q1.3
NetC3_2: C3.2 C4.2 L1.2 U1.3
NetC5_2: C5.2 C6.2 J3.1 pad. U1.4
NetC7_1: C7.1 J1.SH1 J1.SH2 J1.SH3 J1.SH4
NetC9_2: C9.2 R5.1 Y1.4
NetC10_1: C10.1 Q1.1 R6.2
NetD1_1: D1.1 R7.1 | length 2
  Top Layer w1: R7.1 D1.1
NetD2_1: D2.1 R8.1 | length 2
  Top Layer w1: R8.1 D2.1
NetD3_1: D3.1 R9.1 | length 2
  Top Layer w1: R9.1 D3.1
NetD4_1: D4.1 R10.1 | length 2
  Top Layer w1: R10.1 D4.1
NetD5_2: D5.2 J2.4
NetF2_1: F2.1 P1.1 P1.2
NetH2_1: H2.1 H2.2 | length 2.5
  Top Layer w1.5: H2.1 H2.2
NetH3_1: H3.1 H3.2 | length 2.5
  Top Layer w1.5: H3.1 H3.2
NetH4_1: H4.1 H4.2 | length 2.5
  Top Layer w1.5: H4.1 H4.2
NetP1_3: P1.3 RN5.4 | length 3.3
  Top Layer w0.2: P1.3 115.98,96.83 117,97.85 RN5.4
NetP1_4: P1.4 RN6.5 | length 3.2
  Top Layer w0.2: RN6.5 109.05,97.85 110.07,96.83 P1.4
NetP1_5: P1.5 RN5.3 | length 3
  Top Layer w0.2: P1.5 115.875,98.1 116.175,98.4 RN5.3
NetP1_6: P1.6 RN6.6 | length 2.7
  Top Layer w0.2: RN6.6@108.6,98.4 109.775,98.4 110.075,98.1 P1.6
NetP1_7: P1.7 RN5.2 | length 3.1
  Top Layer w0.2: P1.7 115.875,99.37 116.345,98.9 RN5.2
NetP1_8: P1.8 RN6.7 | length 2.8
  Top Layer w0.2: RN6.7@108.6,98.9 109.605,98.9 110.075,99.37 P1.8
NetP1_9: P1.9 RN5.1 | length 3.4
  Top Layer w0.2: P1.9 114.848,100.542 115.958,100.542 117.05,99.45 RN5.1
NetP1_10: P1.10 RN6.8 | length 3.3
  Top Layer w0.2: RN6.8 108.453,99.503 109.003,99.503 109.992,100.492 111.052,100.492 P1.10
NetP1_11: P1.11 RN7.4 | length 3.3
  Top Layer w0.2: P1.11 115.91,101.91 116.95,102.95 RN7.4
NetP1_12: P1.12 RN8.5 | length 3.2
  Top Layer w0.2: RN8.5 109,102.95 110.04,101.91 P1.12
NetP1_13: P1.13 RN7.3 | length 3
  Top Layer w0.2: P1.13 115.875,103.18 116.195,103.5 RN7.3
NetP1_14: P1.14 RN8.6 | length 2.7
  Top Layer w0.2: RN8.6@108.59,103.5 109.755,103.5 110.075,103.18 P1.14
NetP1_15: P1.15 RN7.2 | length 3
  Top Layer w0.2: P1.15 115.875,104.45 116.325,104 RN7.2
NetP1_16: P1.16 RN8.7 | length 2.8
  Top Layer w0.2: RN8.7@108.59,104 109.625,104 110.075,104.45 P1.16
NetP1_17: P1.17 RN7.1 | length 3.3
  Top Layer w0.2: P1.17 115.84,105.72 117.01,104.55 RN7.1
NetP1_18: P1.18 RN8.8 | length 3.3
  Top Layer w0.2: RN8.8 109.004,104.55 109.992,105.538 111.018,105.538 P1.18
NetR11_1: R11.1 U2.37 | length 2.5
  Top Layer w0.2: R11.1 93.25,72.5 U2.37
NetR12_1: R12.1 U2.39 | length 2.4
  Top Layer w0.2: R12.1 94.25,72.25 U2.39
NetR13_2: R13.2 U2.88 | length 2.4
  Top Layer w0.2: U2.88 93.75,90.65 93.9,90.8 R13.2
NetR14_2: R14.2 U2.90 | length 2.4
  Top Layer w0.2: R14.2 92.65,90.8 92.75,90.7 U2.90
TCK: J2.1 R4.2 U2.24 | length 43.5
  Top Layer w0.2: J2.1 76.6,46.45 76.6,48.336 78.514,50.25 84.493,50.25 85,50.757 R4.2 85,52.5 83.75,53.75 83.75,55.4 84.05,55.7 84.05,65.743 82.5,67.293 82.5,74.907 83.493,75.9 U2.24
TDI: J2.9 R2.2 U2.23 | length 61.9
  Top Layer w0.2: U2.23 83.286,76.4 82,75.114 82,67.086 83.55,65.536 83.55,57.1 81.4,54.95 81.4,53.7 82.6,52.5 R2.2 82.6,51.55 81.8,50.75 78.307,50.75 76.1,48.543 76.1,43.35 76.5,42.95 81.8,42.95 82.35,43.5 82.35,45.45 82.65,45.75 84.55,45.75 84.9,45.4 84.9,42.817 85.217,42.5 86.71,42.5 J2.9
TDO: J2.3 R3.2 U2.25 | length 42.5
  Top Layer w0.2: J2.3 79.85,45.74 79.85,49.6 80,49.75 85.9,49.75 87.4,51.25 R3.2 87.4,52.5 86.2,53.7 86.2,56.35 84.55,58 84.55,65.95 83,67.5 83,74.7 83.7,75.4 U2.25
TMS: J2.5 R1.2 U2.22 | length 54.2
  Top Layer w0.2: J2.5 83.63,43.123 82.957,42.45 76.15,42.45 75.6,43 75.6,48.75 78.1,51.25 79.95,51.25 80.19,51.49 80.19,52.44 R1.2 80.2,52.5 79.2,53.5 79.2,55.35 79.979,56.129 81.871,56.129 83.05,57.307 83.05,65.329 81.5,66.879 81.5,75.321 83.079,76.9 U2.22
VCC: C8.2 C14.2 C15.2 C16.2 C17.2 C18.2 C19.2 C20.2 C21.2 F2.2 FL1.2 FL2.1 R1.1 R2.1 R3.1 R5.2 R12.2 R13.1 R15.2 R16.2 R17.2 U2.9 U2.13 U2.31 U2.45 U2.59 U2.63 U2.80 U2.94 | length 27.1
  Top Layer w0.2: R1.1 v1(80.2,55.1) ; R2.1 v1(82.6,55.1) ; C15.2 84.05,80.95 84.5,81.4 U2.13 v1(87.6,81.4) ; C14.2 84.75,83.3 84.85,83.4 U2.9 87.183,83.4 87.433,83.65 v1(87.45,83.65) ; C16.2 U2.31 ; v1(90.75,87.8) U2.94 ; R13.1 v1(93.9,92.95) ; U2.45 97.25,72.1 97.45,71.9 ; v1(97.75,87.85) U2.80 97.75,91.15 C19.2 ; v1(100.05,81.4) U2.63 101.428,81.392 102.559,81.392 102.851,81.1 C20.2 ; v1(100.1,79.4) U2.59 101.46,79.36 102.29,79.36 C18.2
  other v1: 87.25,55.15 87.85,55.15 88.45,55.15 101.45,73.3 102.05,73.3 101.45,73.9 102.05,73.9 101.45,74.5 102.05,74.5 106.7,93.15 107.3,93.15 106.7,93.85 107.3,93.85 94.25,97
pads on no net: A1.5V A1.A4(SDA) A1.A5(SCL) A1.AREF A1.IOREF A1.P1 A1.RST A1.VIN J1. J1.2 J1.3 J1.4 J2.6 J2.7 J2.8 P1.21 P1.22 RN4.3 RN4.4 RN4.5 RN4.6 U1.2 U2.12 U2.14 U2.21 U2.26 U2.27 U2.28 U2.29 U2.30 U2.33 U2.34 U2.35 U2.36 U2.38 U2.40 U2.41 U2.42 U2.43 U2.47 U2.48 U2.49 U2.50 U2.51 U2.52 U2.53 U2.54 U2.55 U2.56 U2.57 U2.58 U2.61 U2.62 U2.86 U2.87 U2.89 U2.91 U2.92 U2.99 U2.100 Y1.1

## Polygon pours and split planes (outlines as drawn)
GND on Bottom Layer "NONET_L01_P-001" (solid, pour order 0): 71.5,109.45 124.25,109.45 124.25,41.45 71.5,41.45
NetC5_2 on Top Layer "NONET_L01_P-001" (solid, pour order 2): 98.2,63.5 98.55,63.15 123.9,63.15 124.25,63.5 124.25,74.8 123.9,75.15 118.65,75.15 118.3,74.8 118.3,70.45 113.25,65.4 98.55,65.4 98.2,65.05

## Keep-outs
Keep-Out Layer:
  lines w0.254: 71,41 71,107.6 71,110.2 116.5,110.2 124.8,110.2 124.8,105.6 124.8,41 71,41

## Other copper
Top Layer:
  rectangle net GND: 113.45,80.15 117.9,82.15
  rectangle net GND: 109.95,78 113.55,82.15
  rectangle net GND: 94.25,99.3 96,101.75
  rectangle net GND: 100,99.3 101.55,101.8
  rectangle net VCC: 106.4,92.5 109.05,94.2
  rectangle net GND: 110.2,106.95 115.75,109.15
  rectangle net GND: 82.05,105.65 89.3,106.75
  rectangle net VCC: 93.2,96.6 99.5,97.35
  rectangle net GND: 90,70.35 92.55,70.85
  rectangle net GND: 96,70.25 98.65,70.85
  rectangle net GND: 82.3,82 85,82.591
  rectangle net GND: 103.4,78.75 104.55,80.35
  rectangle net NetC9_2: 104.9,73 108.25,77.65
  region net NetA1_3V3: 124.25,76.1 123.9,75.75 119,75.75 119,77.85 123.9,77.85 124.25,77.5
  region net NetC7_1: 100,50.05 99.65,49.7 99.65,42.35 100,42 115.2,42 115.55,42.35 115.55,49.7 115.2,50.05 110.1,50.05 110.1,45.3 103.4,45.3 103.4,50.05
  region net VCC: 117.9,70.75 113.1,65.95 97.15,65.95 96.8,65.6 96.8,65.05 92.75,65.05 92.3,64.6 92.3,55 91.05,53.75 86.95,53.75 86.95,56.15 88.9,58.1 88.9,71.7 89.05,71.85 90.5,71.85 90.5,71.35 89.8,71.35 89.65,71.2 89.65,70 89.8,69.85 92.95,69.85 93.3,70.2 93.3,70.8 95.2,70.8 95.2,70.2 95.55,69.85 98.85,69.85 99.2,70.2 99.2,71 98.85,71.35 97.3,71.35 97.3,72.05 100.4,72.05 100.75,72.4 100.75,74.45 101.1,74.8 104.05,74.8 104.4,74.45 104.4,72.4 104.75,72.05 111.85,72.05 116.2,76.4 116.2,79.6 117.9,79.6 117.9,72.45
  region net NetF2_1: 115.8,95.55 110.2,95.55 110.2,92.4 111.8,92.4 111.8,94.35 115.8,94.35
  region net GND: 103.8,59.8 103.45,59.45 103.45,55.95 103.1,55.6 99,55.6 99,58.95 99.35,59.3 101.25,59.3 101.25,62.4 101.6,62.75 123.9,62.75 124.25,62.4 124.25,46.5 121.85,46.5 121.85,41.45 117,41.45 116.65,41.8 116.65,50.65 116.3,51 109.6,51 109.25,50.65 109.25,47.75 108.05,47.75 108.05,53.5 108.4,53.85 119.65,53.85 120,54.2 120,59.45 119.65,59.8
  region net NetD5_2: 81.95,48.05 82.1,48.2 94,48.2 96.7,50.9 96.7,59.1 95.2,59.1 95.2,57.2 87.3,49.3 80.4,49.3 80.25,49.15 80.25,46.2 81.95,46.2
  region net 3.3V: 95.45,60.2 95.1,60.55 95.1,63.95 96.8,63.95 96.8,62.5 97.15,62.15 100.4,62.15 100.4,60.2
  region net NetC10_1: 99.3,54.5 105.3,54.5 105.3,53.8 99.3,53.8
  region net NetC3_2: 119.35,57.4 119,57.05 105.9,57.05 105.9,59.25 119,59.25 119.35,58.9
  region net NetC1_2: 119.3,54.6 118.95,54.25 107.6,54.25 107.25,53.9 107.25,52.85 105.9,52.85 105.9,56.4 106.25,56.75 118.95,56.75 119.3,56.4
  region net 5V: 103.9,51 104.25,50.65 104.25,47.75 105.4,47.75 105.4,52.85 99.65,52.85 99.65,51.35 100,51
  text "EPM240" at 76.65,58.05 h1 r90
  text "EXTENSION MODULE" at 78.15,52.95 h1 r90
Bottom Layer:
  rectangle net VCC: 79.5,54.65 89.05,55.55
  region net VCC: 99.1,88.4 105.067,94.367 107.7,94.367 107.7,92.7 101.65,86.65 100.75,86.65 100.75,74.85 102.5,74.85 102.5,73 97.5,73 97.5,80.8 86.75,80.8 86.75,88.4 93.35,88.4 93.35,97.7 94.6,97.7 94.6,88.4

## Silkscreen, mask and mechanical layers (free items; w line width, h text height)
Top Overlay:
  text "7.2023" at 114.5,86.5 h0.8
  text "JTAG" at 96.9,42.15 h3 r90
Top Solder:
  rectangle: 75.3,52.45 78.65,68.85

## Text inside footprints (layer, text, board x,y; h text height)
J2: Mechanical 13 "1" at 76.645,43.865 h1.27; Mechanical 13 "10" at 90.14,46.305 h1.27